# Altium PCB PCB_kol.PcbDoc
Units mil, origin at the board's own origin, x right, y up, seen from the top; angles counter-clockwise.
Board outline 2952.76 x 2952.76 mil, 4 copper layers (Top Layer, Mid 1 - POWER, Mid 2 - GND, Bottom Layer), stack 38.364 mil thick; 6 components, 21 nets, 136 pads, 182 vias.
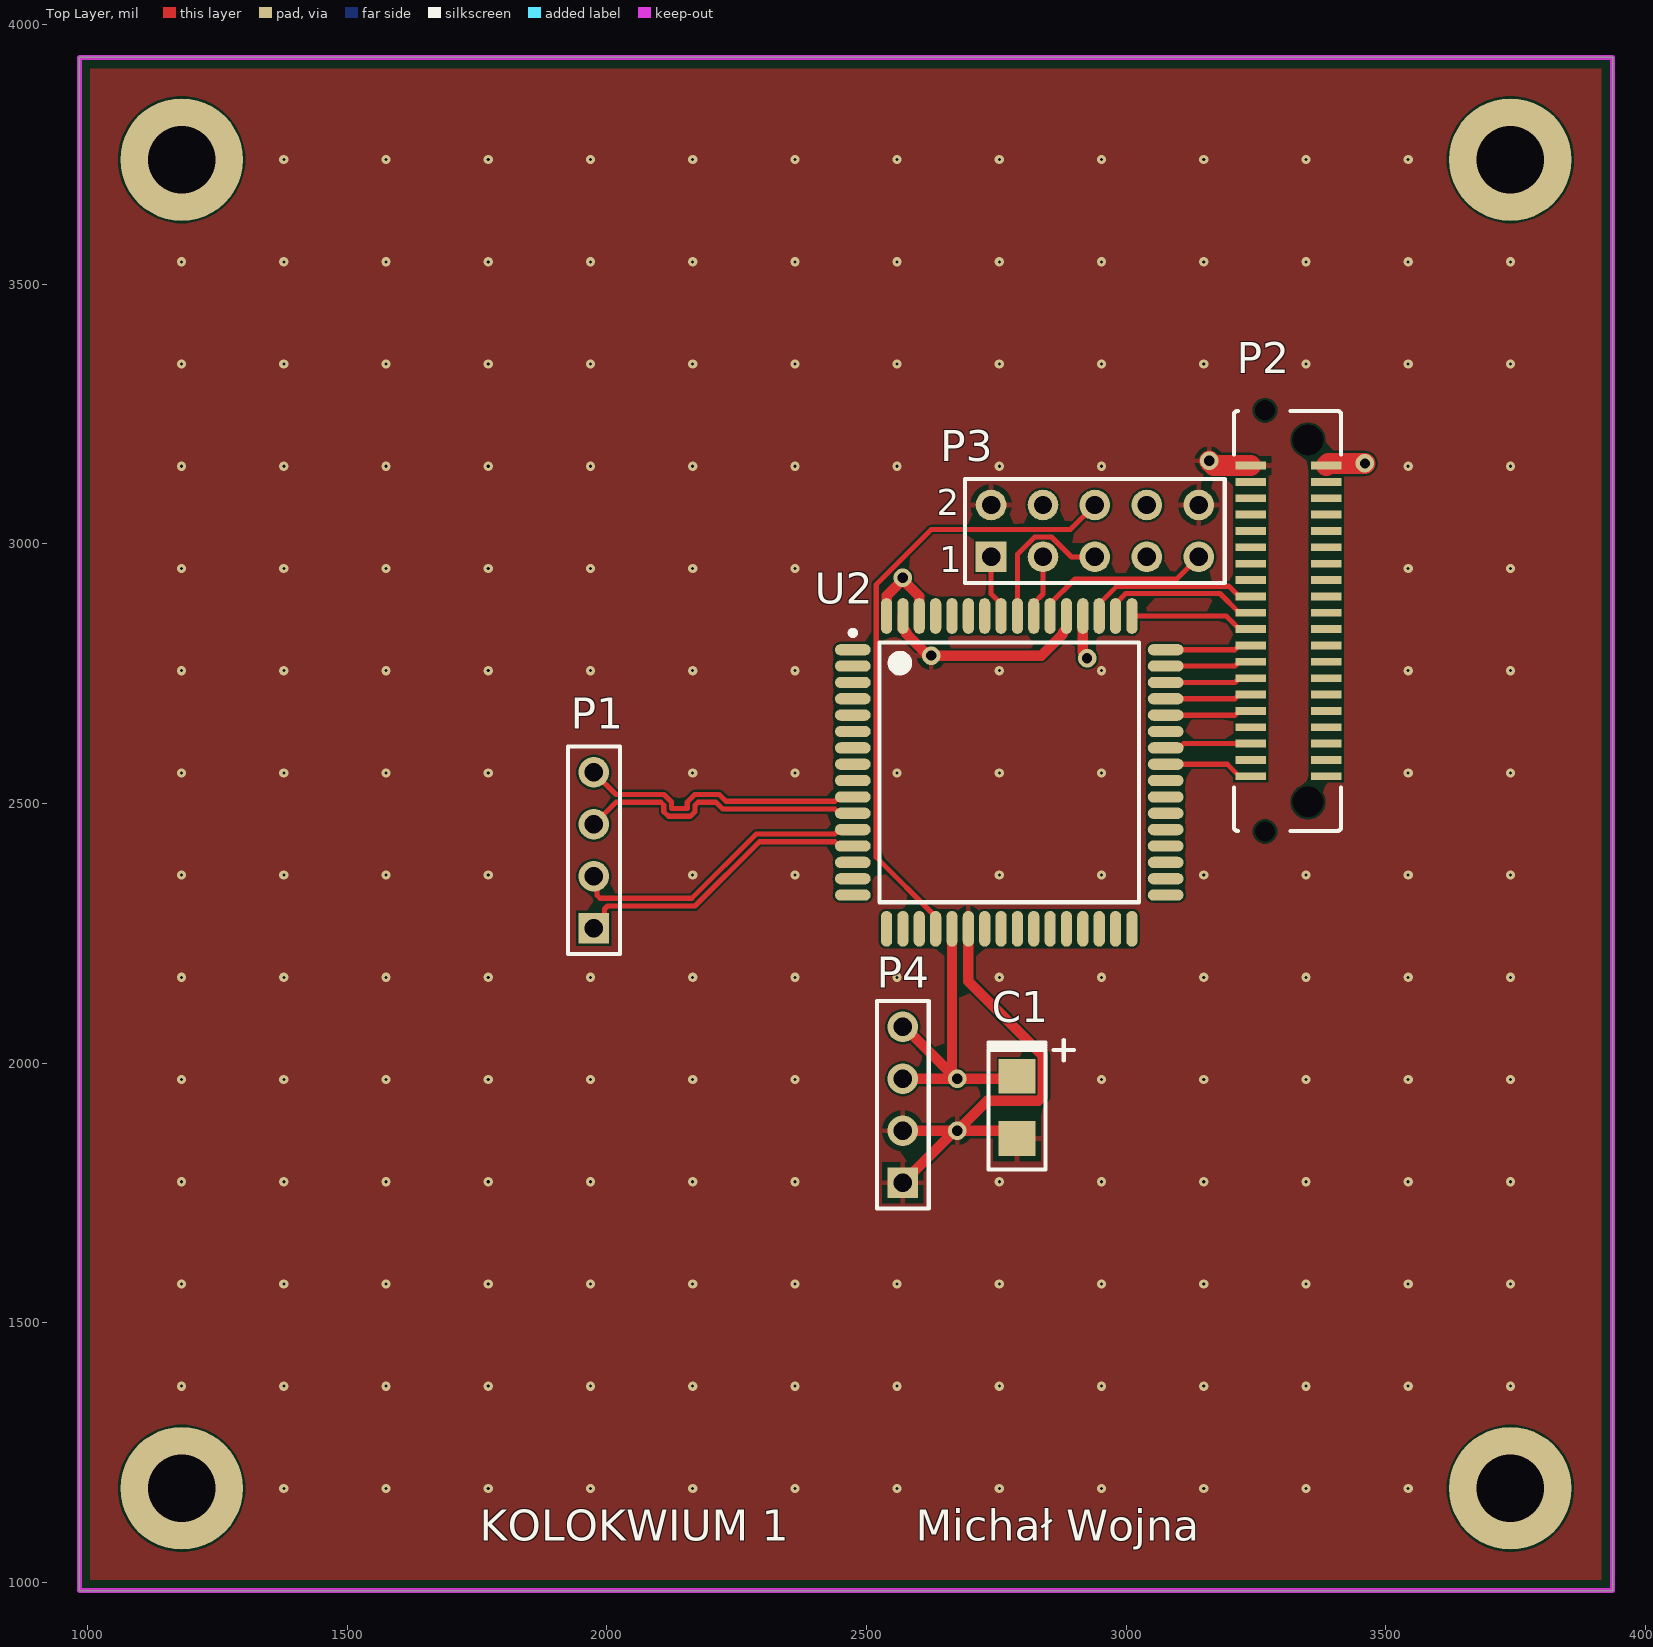
[diagram p0: Top Layer view]
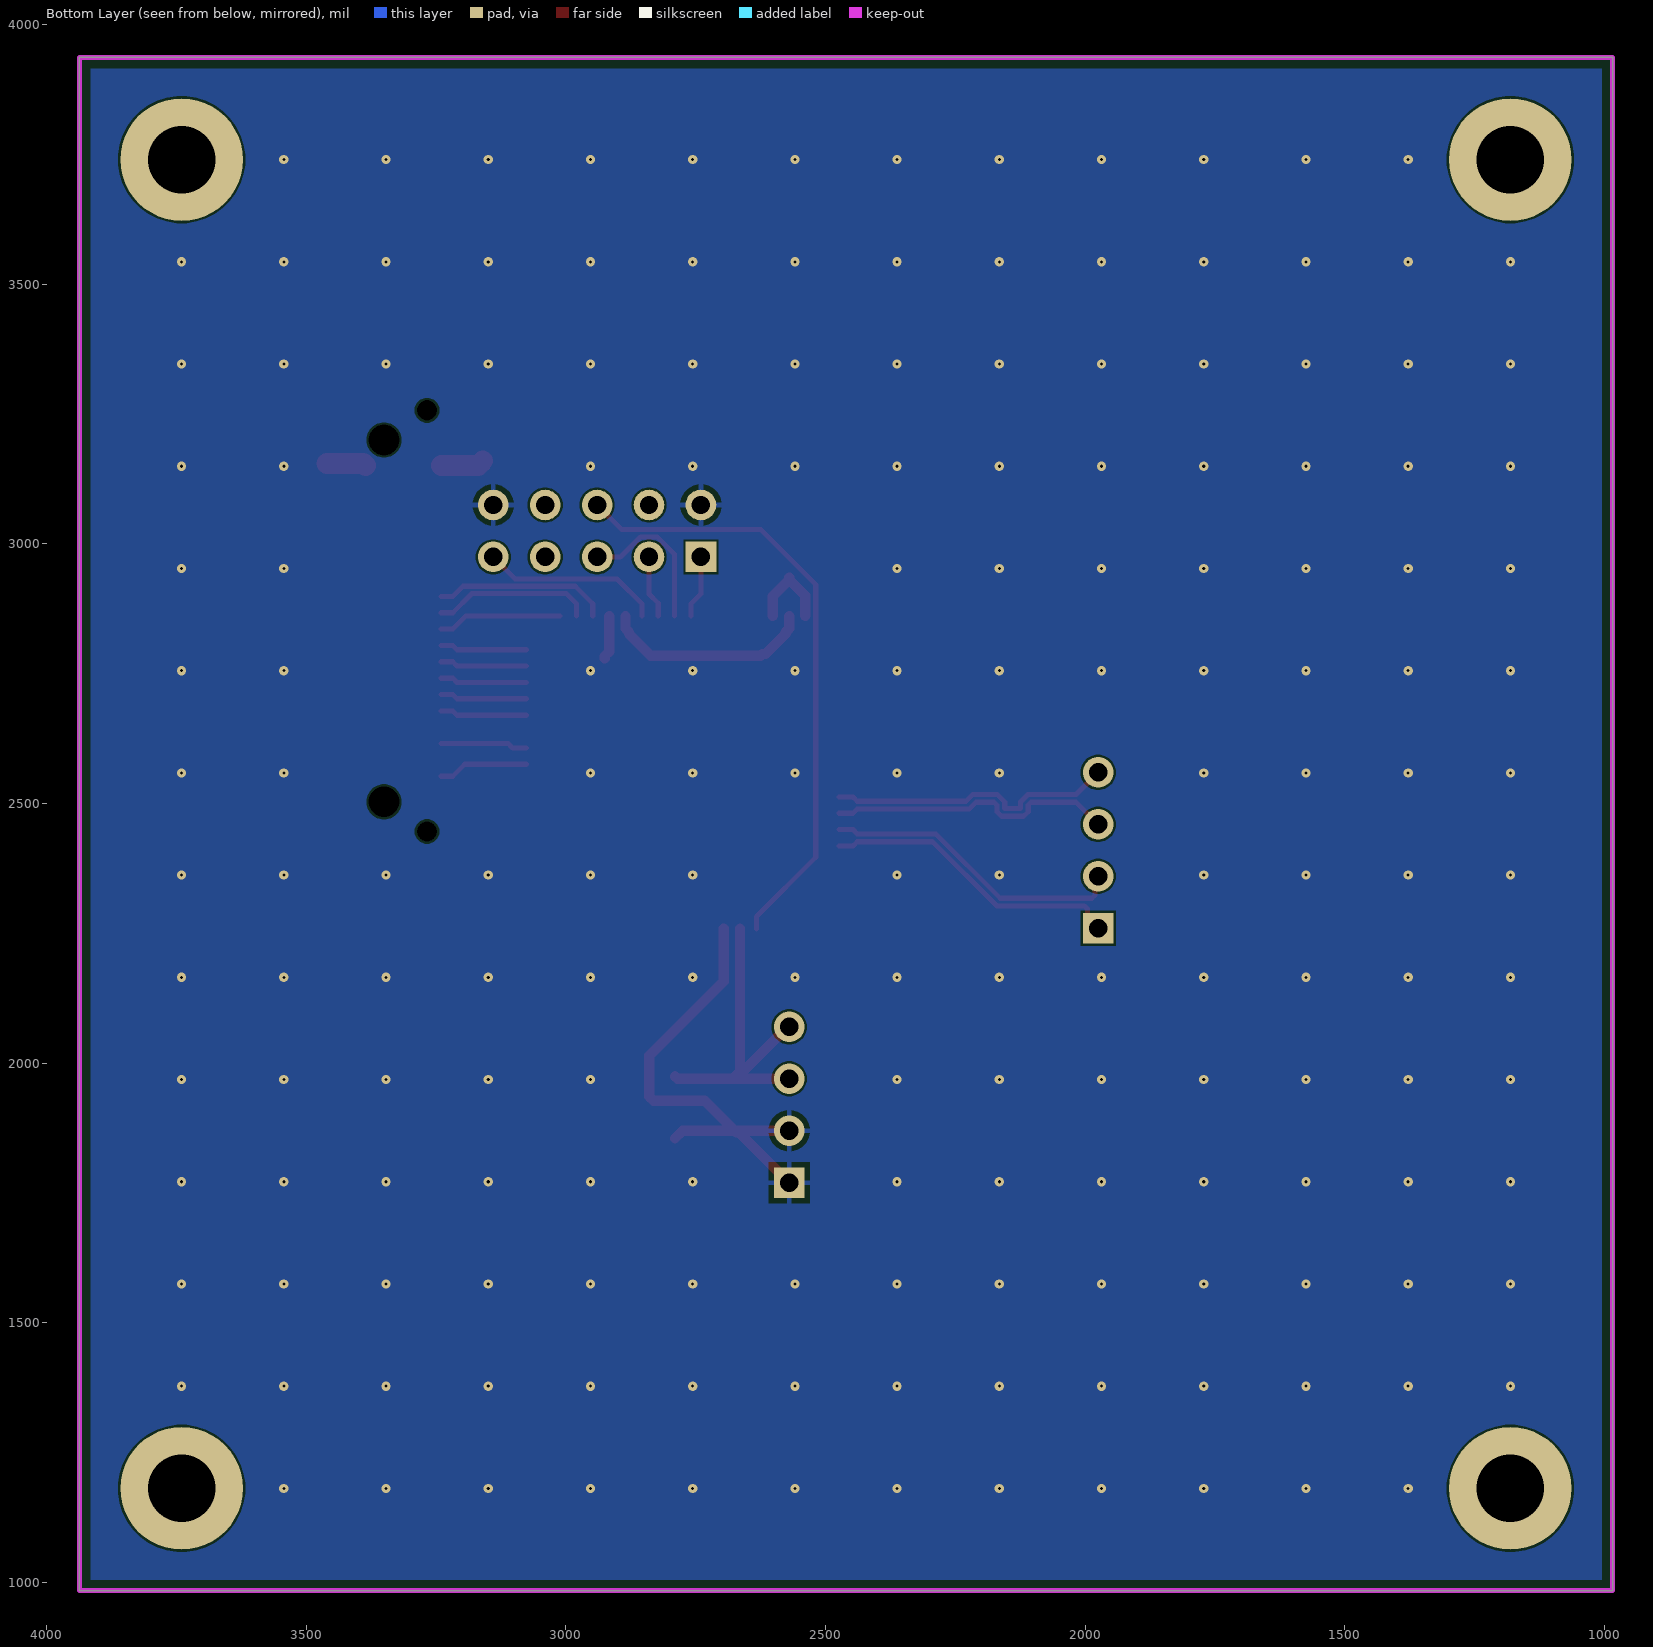
[diagram p1: Bottom Layer view, seen from below]
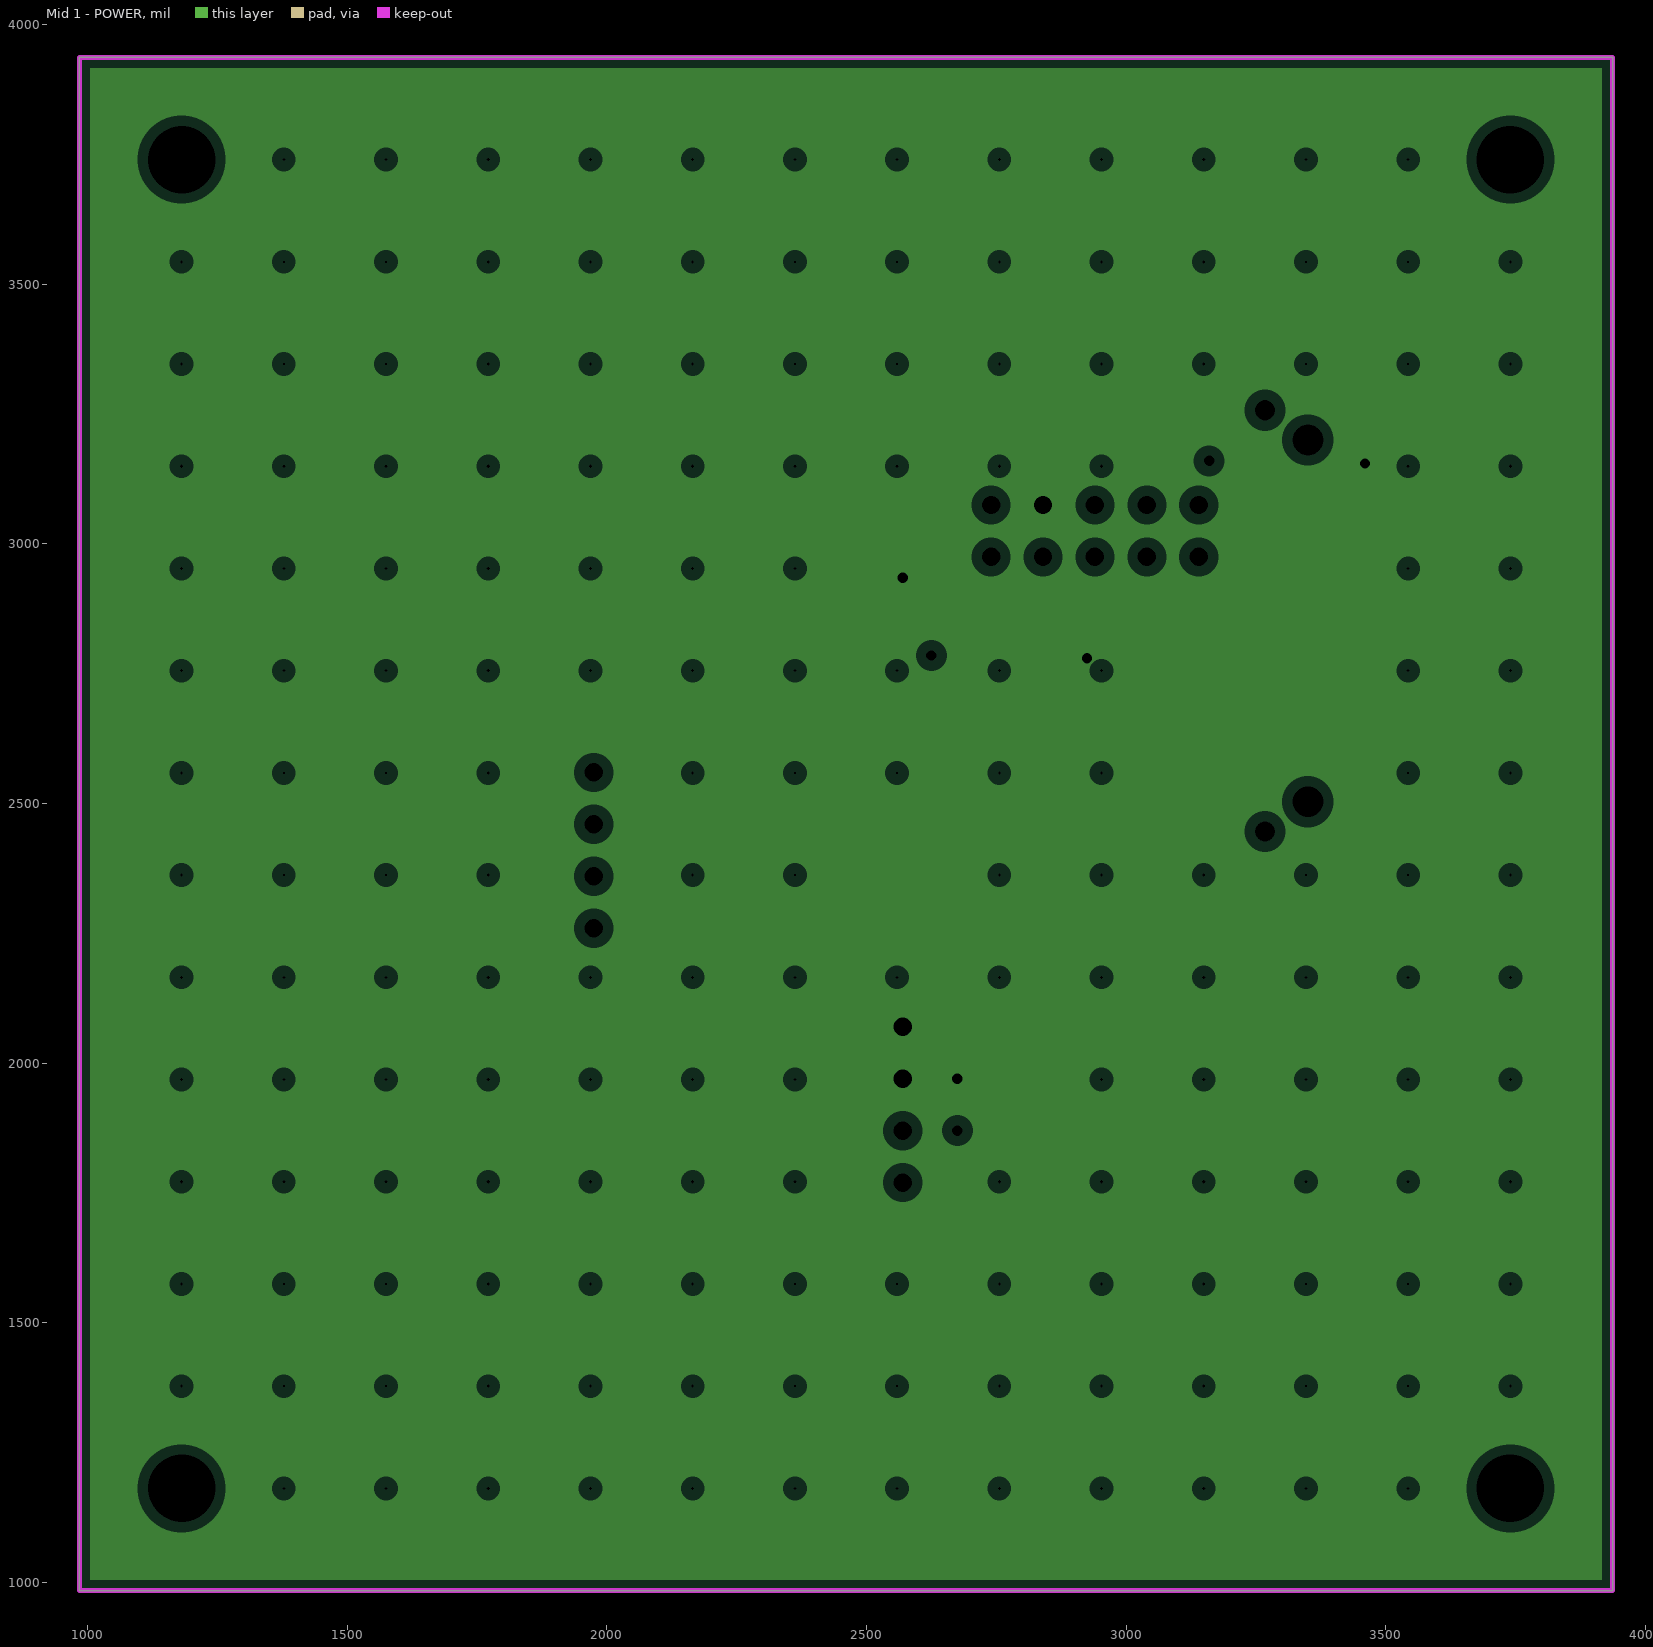
[diagram p2: Mid 1 - POWER, clearances drawn from the general rule]
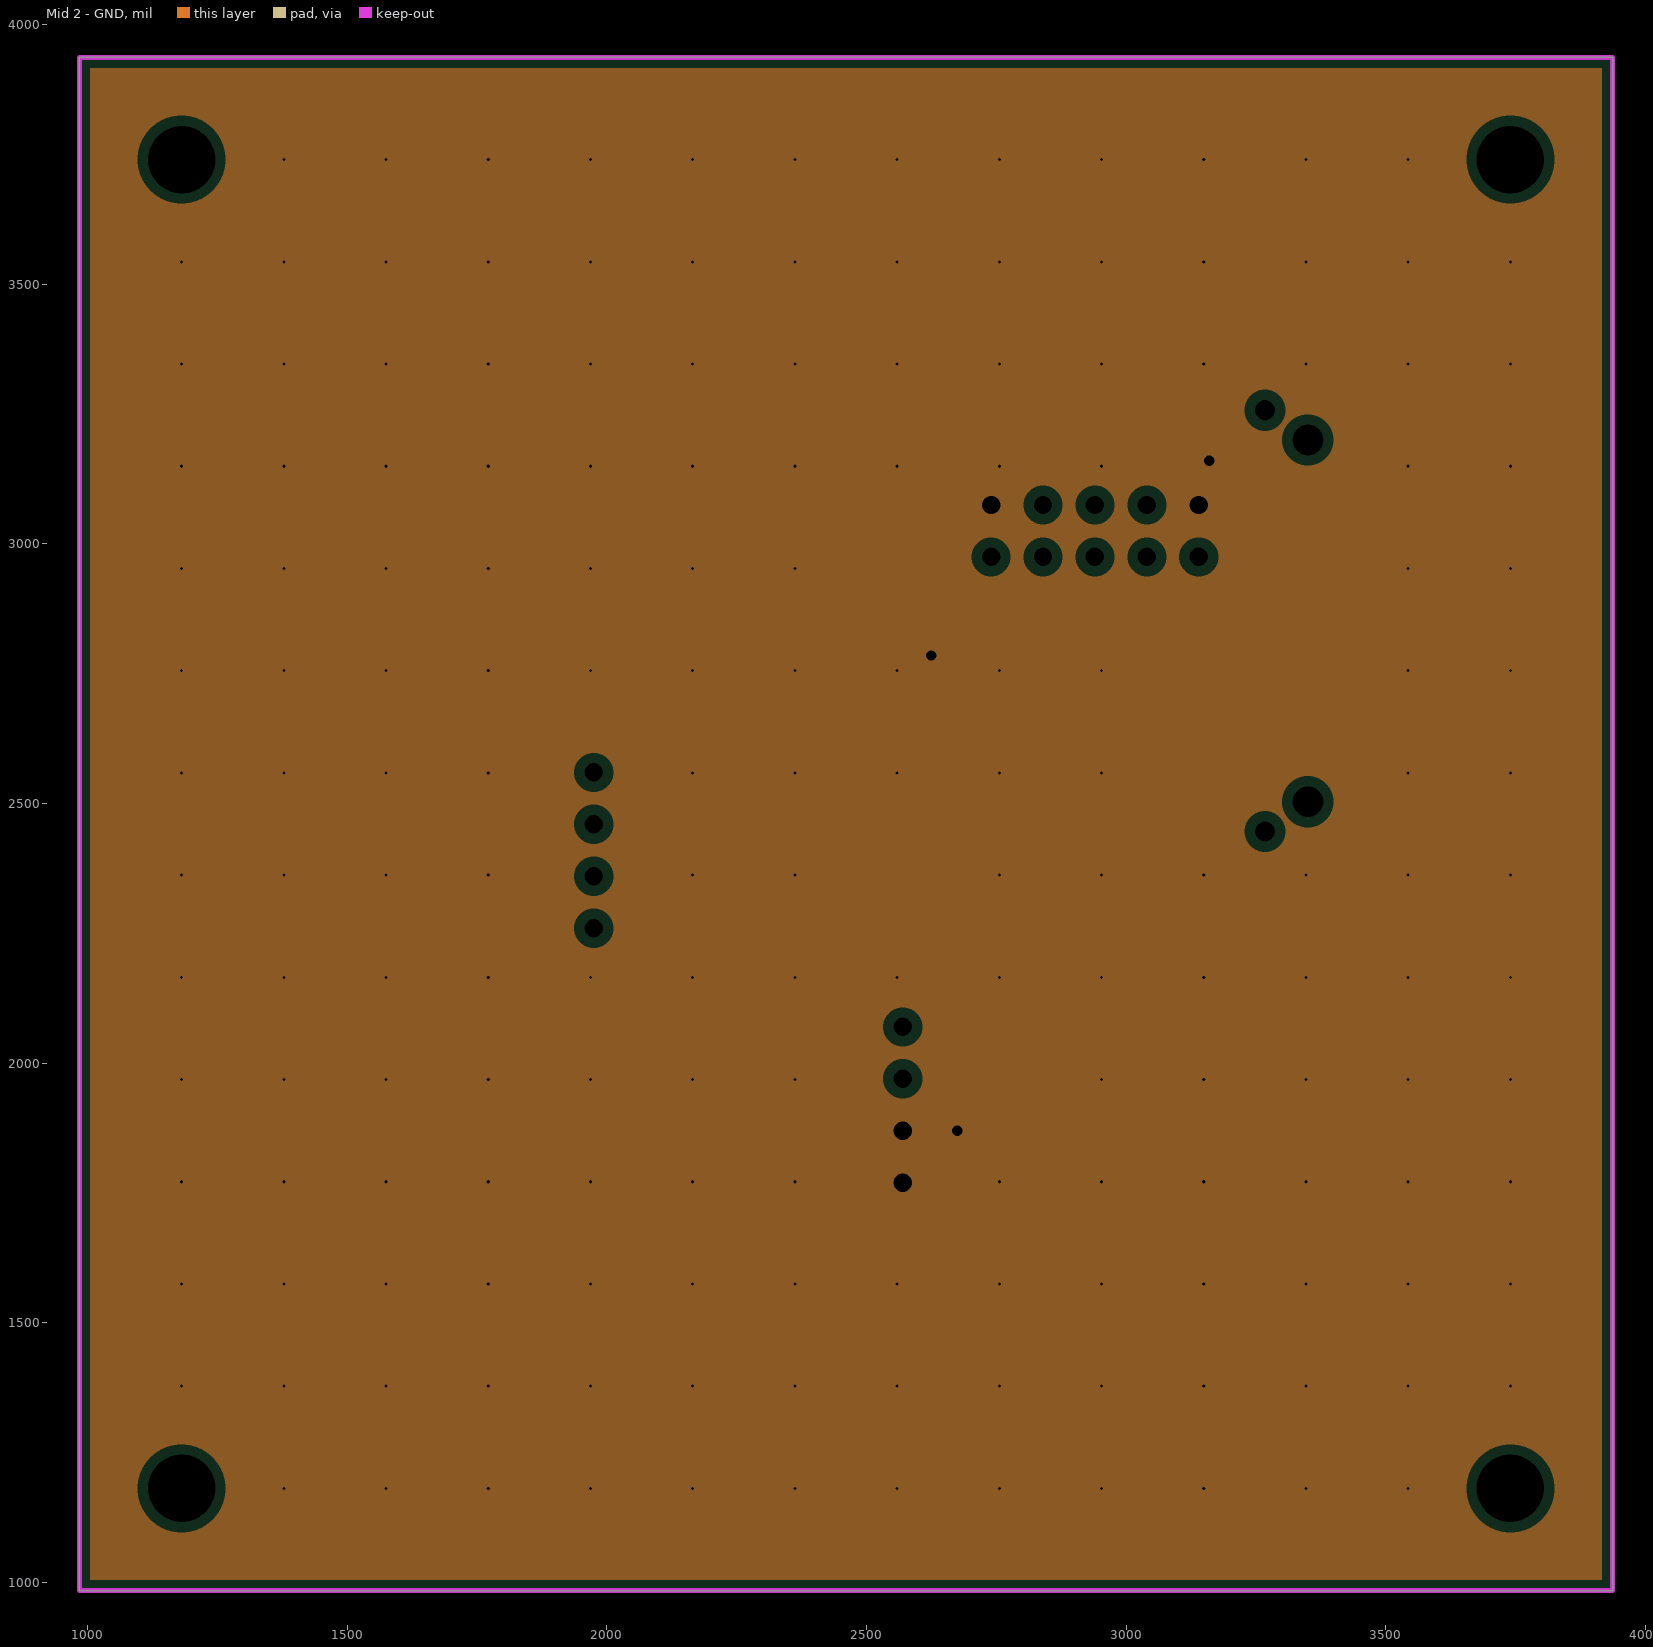
[diagram p3: Mid 2 - GND, clearances drawn from the general rule]

## Layer stack, top to bottom
Top Solder: solder mask 0.4, Solder Resist, Dk 3.5
Top Layer: signal copper 0.709
Dielectric 1: prepreg 10.087, Isola IS400, Dk 3.97
Mid 1 - POWER: plane copper 1.378, net 5V0
Dielectric 2: core 14.016, Isola IS400, Dk 3.97
Mid 2 - GND: plane copper 1.378, net GND
Dielectric 3: prepreg 10.087, Isola IS400, Dk 3.97
Bottom Layer: signal copper 0.709
Bottom Solder: solder mask 0.4, Solder Resist, Dk 3.5

## Board outline
984.25,984.25 3937.01,984.25 3937.01,3937.01 984.25,3937.01

## Design rules (kind name [scope] priority, off if disabled: settings)
Clearance [All] p1: gap=4 ignorepadtopadclearanceinfootprint=TRUE
DiffPairsRouting [InDifferentialPairClass('All Differential Pairs')] p1: maxlimit=5 minlimit=5 mostfreqgap=5 toplayer_minwidth=10 toplayer_maxwidth=10 toplayer_prefwidth=10 bottomlayer_minwidth=10 bottomlayer_maxwidth=10 bottomlayer_prefwidth=10 impedanceprofiledriven=TRUE impedanceprofileid={655E532C-7196-4E46-AC67-4B08DF412818} impedanceprofilevalue=100.000000 maxuncoupledlength=500
HoleSize [All] p1: absolutevalues=TRUE maxlimit=130 minlimit=1 maxpercent=80.000 minpercent=20.000
MatchedLengths [InDifferentialPairClass('All Differential Pairs')] p1: tolerance=50 checknetsindiffpair=FALSE checkdiffpairvsdiffpair=TRUE checkxsignals=TRUE checkothers=TRUE
MinimumSolderMaskSliver [All] p1: minsoldermaskwidth=4
PlaneClearance [All] p1: clearance=20
PlaneConnect [(InNet('5V0') OR InNet('GND'))] p1: planeconnectstyle=Direct reliefexpansion=20 reliefentries=4 reliefconductorwidth=10 reliefairgap=10
PolygonConnect [All] p1: connectstyle=Relief reliefconductorwidth=10 reliefentries=4 polygonreliefangle="90 Angle" airgapwidth=10
RoomDefinition U_Processor [InComponentClass('U_Processor')] p1: confinementstyle=ConfineIn formatcopy=TRUE lockcomponents=FALSE outline 2419.53,2204.53 2419.53,2915.47 3130.47,2915.47 3130.47,2204.53 2913.94,1781.06 2721.06,1781.06
RoomDefinition Schemat_top [InComponentClass('Schemat_top')] p2: confinementstyle=ConfineIn formatcopy=TRUE lockcomponents=FALSE outline 1911.06,2196.06 1911.06,2623.94 2617,3138.94 3192.6,3308.58 3429.14,3308.58 3429.14,2394.88 2633.94,1706.06 2506.06,1706.06
RoutingVias [All] p1: holewidth=28 width=50 viastyle="Through Hole" minholewidth=28 minwidth=50 maxholewidth=28 maxwidth=50
SolderMaskExpansion [All] p1: expansion=2 istentingtop=FALSE
SupplyNets "Schematic Supply Nets_1" [InNet('5V0')] p1: voltage=0.000
SupplyNets "Schematic Supply Nets" [InNet('GND')] p2: voltage=0.000
Width gnd&5v0 [(InNet('5V0') OR InNet('GND'))] p1: maxlimit=100 minlimit=20 preferedwidth=40
Width Width_1 [All] p2: maxlimit=10 minlimit=10 preferedwidth=10
25 further rules are at their usual default settings.

## Classes and differential pairs
net class BUS[0..7]: BUS0 BUS1 BUS2 BUS3 BUS4 BUS5 BUS6 BUS7
component class Schemat_top: P1 P2 P3 P4
component class U_Processor: C1 C? U2
differential pair output2: +output2_P -output2_N
differential pair output1: +output1_P -output1_N

## Components (designator, comment, footprint, x,y, rotation, side; value= is the part's Value field where it differs from the comment)
C1 "22u" VJ_Tantalum_A 2790,1915 r270 top
P1 "Header 4" HDR1X4 1975,2260 r90 top
P2 "SAMTEC LSEM 40-pin" LSEM-120-03.0-L-DV-A-N-K-TR 3312.83,2851.73 r90 top
P3 "Header 5X2" HDR2X5 2740,2975 r0 top
P4 "Header 4" HDR1X4 2570,1770 r90 top
U2 "ATmega128-16AU" 64A_N 2775,2560 r0 top

## Footprints (in the part's own frame and the unit in brackets; to place one, negate y for a bottom-side part, rotate by r counter-clockwise, add the part's x,y. Pads: shape width x height; smd on the part's side, far side on the other; paste and mask are expansions set on the pad)
64A_N [mm] "Thin QFP, 64-Leads, Body 14x14mm, Pitch 0.8mm, IPC Medium Density"
  oval 1.75x0.55 smd: 1(-7.65,6) 2(-7.65,5.2) 3(-7.65,4.4) 4(-7.65,3.6) 5(-7.65,2.8) 6(-7.65,2) 7(-7.65,1.2) 8(-7.65,0.4) 9(-7.65,-0.4) 10(-7.65,-1.2) 11(-7.65,-2) 12(-7.65,-2.8) 13(-7.65,-3.6) 14(-7.65,-4.4) 15(-7.65,-5.2) 16(-7.65,-6) 33(7.65,-6) 34(7.65,-5.2) 35(7.65,-4.4) 36(7.65,-3.6) 37(7.65,-2.8) 38(7.65,-2) 39(7.65,-1.2) 40(7.65,-0.4) 41(7.65,0.4) 42(7.65,1.2) 43(7.65,2) 44(7.65,2.8) 45(7.65,3.6) 46(7.65,4.4) 47(7.65,5.2) 48(7.65,6)
  oval 0.55x1.75 smd: 17(-6,-7.65) 18(-5.2,-7.65) 19(-4.4,-7.65) 20(-3.6,-7.65) 21(-2.8,-7.65) 22(-2,-7.65) 23(-1.2,-7.65) 24(-0.4,-7.65) 25(0.4,-7.65) 26(1.2,-7.65) 27(2,-7.65) 28(2.8,-7.65) 29(3.6,-7.65) 30(4.4,-7.65) 31(5.2,-7.65) 32(6,-7.65) 49(6,7.65) 50(5.2,7.65) 51(4.4,7.65) 52(3.6,7.65) 53(2.8,7.65) 54(2,7.65) 55(1.2,7.65) 56(0.4,7.65) 57(-0.4,7.65) 58(-1.2,7.65) 59(-2,7.65) 60(-2.8,7.65) 61(-3.6,7.65) 62(-4.4,7.65) 63(-5.2,7.65) 64(-6,7.65)
  silkscreen extent -7.77,-6.35 6.35,6.95, body extent -7,-7 7,7, height 1.2
HDR1X4 [mm] "Connector; Header; 4 Position"
  rect 1.5x1.5 hole 0.9: 1(0,0)
  round 1.5 hole 0.9: 2(2.54,0) 3(5.08,0) 4(7.62,0)
  silkscreen extent -1.27,-1.27 8.89,1.27
HDR2X5 [mm] "Connector; Header; 5x2 Position"
  rect 1.5x1.5 hole 0.9: 1(0,0)
  round 1.5 hole 0.9: 2(0,2.54) 3(2.54,0) 4(2.54,2.54) 5(5.08,0) 6(5.08,2.54) 7(7.62,0) 8(7.62,2.54) 9(10.16,0) 10(10.16,2.54)
  silkscreen extent -1.27,-1.27 11.43,3.81
LSEM-120-03.0-L-DV-A-N-K-TR [mm] "LSEM 0.8mm Razor Beam Hermaphroditic Connector 40-pin"
  round 0 hole 1 unplated: 0(-10.3,1.15) 0(10.3,1.15)
  round 2 on Top Paste paste+2: 0(-10.3,1.15) 0(10.3,1.15)
  round 2.1 on Top Solder paste+2: 0(-10.3,1.15) 0(10.3,1.15)
  round 0 hole 1.5 unplated: 0(-8.85,-0.95) 0(8.85,-0.95)
  rect 0.38x1.5 smd: 1(7.6,-1.85) 2(7.6,1.85) 3(6.8,-1.85) 4(6.8,1.85) 5(6,-1.85) 6(6,1.85) 7(5.2,-1.85) 8(5.2,1.85) 9(4.4,-1.85) 10(4.4,1.85) 11(3.6,-1.85) 12(3.6,1.85) 13(2.8,-1.85) 14(2.8,1.85) 15(2,-1.85) 16(2,1.85) 17(1.2,-1.85) 18(1.2,1.85) 19(0.4,-1.85) 20(0.4,1.85) 21(-0.4,-1.85) 22(-0.4,1.85) 23(-1.2,-1.85) 24(-1.2,1.85) 25(-2,-1.85) 26(-2,1.85) 27(-2.8,-1.85) 28(-2.8,1.85) 29(-3.6,-1.85) 30(-3.6,1.85) 31(-4.4,-1.85) 32(-4.4,1.85) 33(-5.2,-1.85) 34(-5.2,1.85) 35(-6,-1.85) 36(-6,1.85) 37(-6.8,-1.85) 38(-6.8,1.85) 39(-7.6,-1.85) 40(-7.6,1.85)
  silkscreen extent -10.28,-2.57 10.28,2.68, body extent -10.2,-2.7 10.2,2.8, height 4.58
VJ_Tantalum_A [mm]
  rect 1.7x1.8 smd: 1(-1.525,0) 2(1.525,0)
  silkscreen extent -3.3,-1.4 3.05,2.79, body extent -1.85,-0.89 1.85,0.89, height 1.6

## Part data
C1: library part Capacitor_polarized, Manufacturer=VJ, Part Number=293D223X9016D2TE3, Rated Voltage=16V, Tolerance=10%, Vendor=Farnell
P1 P4: "Header, 4-Pin", LatestRevisionDate=17-Jul-2002, LatestRevisionNote="Re-released for DXP Platform.", Publisher="Altium Limited"
P2: "Component desciption", Manufacture=SAMTEC, Part Number=LSEM-120-03.0-L-DV-A-N-K-TR, Supplier Part Number 1=2433813, Supplier 1=Farnell
P3: "Header, 5-Pin, Dual row", LatestRevisionDate=17-Jul-2002, LatestRevisionNote="Re-released for DXP Platform.", Publisher="Altium Limited"
U2: "8-bit AVR Microcontroller, 4.5-5.5V, 128KB Flash, 4KB EEPROM, 4KB SRAM, 64-pin TQFP, Industrial Grade (-40°C to 85°C)", Code_JEDEC=MS-026-AEB, ComponentLink1Description="Manufacturer URL", ComponentLink1URL=http://www.atmel.com/, ComponentLink2Description="ATmega128(L) Datasheet", ComponentLink2URL=http://www.atmel.com/dyn/resources/prod_documents/doc2467.pdf, ComponentLink3Description="ATmega128(L) Summary", ComponentLink3URL=http://www.atmel.com/dyn/resources/prod_documents/2467S.pdf, DatasheetVersion="revX, Jun-2011", PackageDescription="64-Pin Plastic Thin Profile Quad Flat Pack, 14 x 14 x 1.0 mm Body, 0.8 mm Pitch (TQFP)", PackageReference=64A, PackageVersion="revC, Oct-2010"

## Free pads (board coordinates)
  round 236.22 hole 129.92: 0(1181.1,1181.1) 0(1181.1,3740.16) 0(3740.16,1181.1) 0(3740.16,3740.16)

## Via types
v1: diameter 17.72/17.72 (per signal layer), hole 5.91, Top Layer to Bottom Layer, 175 vias
v2: diameter 35.43, hole 19.68, Top Layer to Mid 1 - POWER, tented both sides, 4 vias
v3: diameter 35.43, hole 19.68, Top Layer to Mid 2 - GND, tented both sides, 3 vias

## Nets (pads, with @x,y where several pads share a name; then routed paths per layer and width w, separated by ;. In a path a pad name is that pad's centre, name@x,y a point inside that pad or via, vN(x,y) a via of type N, cw(c..) or ccw(c..) an arc to the next point about the centre after c; other vN are vias at no path point)
5V0: C1.1 P2.1 P3.4 P4.3 P4.4 U2.21 U2.52 U2.62 U2.64 | length 989.2
  Top Layer w20: U2.64 2539.1,2861.5 2539.1,2899.92 v2@2570,2930.82 ; P4.3 v2@2672.5,1970 ; P4.4 2572.5,2070 v2@2672.5,1970 ; v2(2570,2935) v2@2570,2930.82 ; U2.62 2601.46,2861.5 2601.46,2899.37 v2@2570,2930.82 ; U2.21 2664.76,1984.41 2675,1974.18 v2(2675,1970) ; C1.1 2784.96,1970 v2(2675,1970) ; U2.52 2916.73,2792.44 2925,2784.18 v2(2925,2780) ; v2@2672.5,1970 v2(2675,1970)
  Top Layer w40: P2.1 3389.72,3155 v2(3460,3155)
BUS0: P2.18 U2.51 | length 337.5
  Top Layer w10: U2.51 2948.23,2884.8 2982.05,2918.63 3198.3,2918.63 3217.95,2898.98 P2.18
BUS1: P2.20 U2.50 | length 307.5
  Top Layer w10: U2.50 2979.72,2884.8 2999.55,2904.63 3180.8,2904.63 3217.95,2867.48 P2.20
BUS2: P2.22 U2.49 | length 239.2
  Top Layer w10: U2.49 3192.76,2861.18 3217.95,2835.98 P2.22
BUS3: P2.24 U2.48 | length 167.2
  Top Layer w10: U2.48 3209.69,2796.22 3217.95,2804.49 P2.24
BUS4: P2.26 U2.47 | length 167.2
  Top Layer w10: U2.47 3209.69,2764.72 3217.95,2772.99 P2.26
BUS5: P2.28 U2.46 | length 167.2
  Top Layer w10: U2.46 3209.68,2733.23 3217.95,2741.5 P2.28
BUS6: P2.30 U2.45 | length 167.2
  Top Layer w10: U2.45 3209.69,2701.73 3217.95,2710 P2.30
BUS7: P2.32 U2.44 | length 167.2
  Top Layer w10: U2.44 3209.69,2670.24 3217.95,2678.5 P2.32
GND: C1.2 P2.2 P3.2 P3.10 P4.1 P4.2 U2.22 U2.53 U2.63 | length 1440.4
  Top Layer w20: P4.1 2667.05,1867.05 2672.05,1867.05 v3(2675,1870) ; P4.2 v3(2675,1870) ; U2.63 2570.28,2837.11 2576.95,2830.44 2576.95,2827.28 2616.27,2787.95 2622.05,2787.95 v3(2625,2785) 2836.29,2785 2878.57,2827.28 2878.57,2830.44 2885.24,2837.11 U2.53 ; U2.22 2696.26,2157.48 2839.43,2014.3 2839.43,1935.78 2831.23,1927.57 2732.57,1927.57 v3(2675,1870) ; C1.2 2774.96,1870 v3(2675,1870)
  Top Layer w40: v3(3160,3160) 3169.06,3150.94 P2.2
  other v1: 1377.95,1181.1 1574.8,1181.1 1771.65,1181.1 1968.5,1181.1 2165.35,1181.1 2362.2,1181.1 2559.05,1181.1 2755.9,1181.1 2952.75,1181.1 3149.6,1181.1 3346.45,1181.1 3543.3,1181.1 1181.1,1377.95 1377.95,1377.95 1574.8,1377.95 1771.65,1377.95 1968.5,1377.95 2165.35,1377.95 2362.2,1377.95 2559.05,1377.95 2755.9,1377.95 2952.75,1377.95 3149.6,1377.95 3346.45,1377.95 3543.3,1377.95 3740.15,1377.95 1181.1,1574.8 1377.95,1574.8 1574.8,1574.8 1771.65,1574.8 1968.5,1574.8 2165.35,1574.8 2362.2,1574.8 2559.05,1574.8 2755.9,1574.8 2952.75,1574.8 3149.6,1574.8 3346.45,1574.8 3543.3,1574.8 3740.15,1574.8 1181.1,1771.65 1377.95,1771.65 1574.8,1771.65 1771.65,1771.65 1968.5,1771.65 2165.35,1771.65 2362.2,1771.65 2755.9,1771.65 2952.75,1771.65 3149.6,1771.65 3346.45,1771.65 3543.3,1771.65 3740.15,1771.65 1181.1,1968.5 1377.95,1968.5 1574.8,1968.5 1771.65,1968.5 1968.5,1968.5 2165.35,1968.5 2362.2,1968.5 2952.75,1968.5 3149.6,1968.5 3346.45,1968.5 3543.3,1968.5 3740.15,1968.5 1181.1,2165.35 1377.95,2165.35 1574.8,2165.35 1771.65,2165.35 1968.5,2165.35 2165.35,2165.35 2362.2,2165.35 2559.05,2165.35 2755.9,2165.35 2952.75,2165.35 3149.6,2165.35 3346.45,2165.35 3543.3,2165.35 3740.15,2165.35 1181.1,2362.2 1377.95,2362.2 1574.8,2362.2 1771.65,2362.2 2165.35,2362.2 2362.2,2362.2 2755.9,2362.2 2952.75,2362.2 3149.6,2362.2 3346.45,2362.2 3543.3,2362.2 3740.15,2362.2 1181.1,2559.05 1377.95,2559.05 1574.8,2559.05 1771.65,2559.05 2165.35,2559.05 2362.2,2559.05 2559.05,2559.05 2755.9,2559.05 2952.75,2559.05 3543.3,2559.05 3740.15,2559.05 1181.1,2755.9 1377.95,2755.9 1574.8,2755.9 1771.65,2755.9 1968.5,2755.9 2165.35,2755.9 2362.2,2755.9 2559.05,2755.9 2755.9,2755.9 2952.75,2755.9 3543.3,2755.9 3740.15,2755.9 1181.1,2952.75 1377.95,2952.75 1574.8,2952.75 1771.65,2952.75 1968.5,2952.75 2165.35,2952.75 2362.2,2952.75 3543.3,2952.75 3740.15,2952.75 1181.1,3149.6 1377.95,3149.6 1574.8,3149.6 1771.65,3149.6 1968.5,3149.6 2165.35,3149.6 2362.2,3149.6 2559.05,3149.6 2755.9,3149.6 2952.75,3149.6 3543.3,3149.6 3740.15,3149.6 1181.1,3346.45 1377.95,3346.45 1574.8,3346.45 1771.65,3346.45 1968.5,3346.45 2165.35,3346.45 2362.2,3346.45 2559.05,3346.45 2755.9,3346.45 2952.75,3346.45 3149.6,3346.45 3346.45,3346.45 3543.3,3346.45 3740.15,3346.45 1181.1,3543.3 1377.95,3543.3 1574.8,3543.3 1771.65,3543.3 1968.5,3543.3 2165.35,3543.3 2362.2,3543.3 2559.05,3543.3 2755.9,3543.3 2952.75,3543.3 3149.6,3543.3 3346.45,3543.3 3543.3,3543.3 3740.15,3543.3 1377.95,3740.15 1574.8,3740.15 1771.65,3740.15 1968.5,3740.15 2165.35,3740.15 2362.2,3740.15 2559.05,3740.15 2755.9,3740.15 2952.75,3740.15 3149.6,3740.15 3346.45,3740.15 3543.3,3740.15
out1: P2.40 U2.41 | length 173.4
  Top Layer w10: U2.41 3194.72,2575.75 3217.95,2552.52 P2.40
out2: P2.36 U2.42 | length 167.2
  Top Layer w10: U2.42 3102.96,2607.24 3111.22,2615.51 P2.36
output1_N: P1.4 U2.10 | length 562
  Top Layer w10: P1.4 2017.5,2517.5 2060,2517.5 2110.1,2517.5 2124.75,2502.86 2124.75,2490.52 2154.75,2490.52 2154.75,2502.86 2169.39,2517.5 2185,2517.5 2216.63,2517.5 2229.62,2504.51 2438.8,2504.51 2447.04,2512.76 U2.10
output1_P: P1.3 U2.11 | length 562
  Top Layer w10: P1.3 2017.5,2502.5 2060,2502.5 2103.89,2502.5 2109.75,2496.64 2109.75,2484.3 2118.53,2475.52 2160.96,2475.52 2169.75,2484.3 2169.75,2496.64 2175.61,2502.5 2185,2502.5 2210.41,2502.5 2223.41,2489.51 2438.8,2489.51 2447.04,2481.26 U2.11
output2_N: P1.2 U2.12 | length 589
  Top Layer w10: P1.2 1981.33,2353.67 1981.33,2323.36 1987.19,2317.5 2163.69,2317.5 2287.7,2441.52 2438.8,2441.52 2447.04,2449.76 U2.12
output2_P: P1.1 U2.13 | length 580.5
  Top Layer w10: P1.1 1995.7,2280.7 1995.7,2296.64 2001.56,2302.5 2169.9,2302.5 2293.92,2426.52 2438.8,2426.52 2447.04,2418.27 U2.13
R\E\S\E\T\: P3.6 U2.20 | length 1194.8
  Top Layer w10: U2.20 2633.27,2282.44 2518.95,2396.76 2518.95,2921.74 2624.75,3027.53 2892.53,3027.53 P3.6
TCK: P3.1 U2.57 | length 121.8
  Top Layer w10: P3.1 2740,2904.06 2759.25,2884.8 U2.57
TDI: P3.9 U2.54 | length 347.2
  Top Layer w10: U2.54 2853.74,2884.8 2901.57,2932.63 3097.63,2932.63 P3.9
TDO: P3.3 U2.55 | length 121.2
  Top Layer w10: U2.55 2822.24,2885.82 2840,2903.57 P3.3
TMS: P3.5 U2.56 | length 298.1
  Top Layer w10: U2.56 2790.75,2980.23 2824.04,3013.53 2856.12,3013.53 2894.65,2975 P3.5
pads on no net: P2.0 P2.3 P2.4 P2.5 P2.6 P2.7 P2.8 P2.9 P2.10 P2.11 P2.12 P2.13 P2.14 P2.15 P2.16 P2.17 P2.19 P2.21 P2.23 P2.25 P2.27 P2.29 P2.31 P2.33 P2.34 P2.35 P2.37 P2.38 P2.39 P3.7 P3.8 U2.1 U2.2 U2.3 U2.4 U2.5 U2.6 U2.7 U2.8 U2.9 U2.14 U2.15 U2.16 U2.17 U2.18 U2.19 U2.23 U2.24 U2.25 U2.26 U2.27 U2.28 U2.29 U2.30 U2.31 U2.32 U2.33 U2.34 U2.35 U2.36 U2.37 U2.38 U2.39 U2.40 U2.43 U2.58 U2.59 U2.60 U2.61

## Polygon pours and split planes (outlines as drawn)
GND on Bottom Layer "GND_L04_P001" (solid, pour order 1): 1005,3915 3915,3915 3915,1005 1005,1005
GND on Top Layer "GND_L01_P000" (solid, pour order 0): 1005,3915 3915,3915 3915,1005 1005,1005
GND on Mid 2 - GND (split plane): 3916.91,1004.35 1004.35,1004.35 1004.35,3916.91 3916.91,3916.91
5V0 on Mid 1 - POWER (split plane): 3916.91,1004.35 1004.35,1004.35 1004.35,3916.91 3916.91,3916.91

## Keep-outs
Keep-Out Layer:
  the board outline again, w10

## Silkscreen, mask and mechanical layers (free items; w line width, h text height)
Top Overlay:
  text "KOLOKWIUM 1" at 1755,1080 h60
  text "Michał Wojna" at 2595,1080 h60

## Dimensions
1181.1,3740.16 to 3740.16,3740.16 on M5 Dimensions
3937.01,984.25 to 3937.01,3937.01 on M5 Dimensions
984.25,984.25 to 3937.01,984.25 on M5 Dimensions

## Text inside footprints (layer, text, board x,y; h text height)
P3: Top Overlay "2" at 2635,3055 h50; Top Overlay "1" at 2640,2945 h50